# Altium PCB Capstone_Signal_Conditioning_Subsystem_Test_PCB.PcbDoc
Units mil, origin at the board's own origin, x right, y up, seen from the top; angles counter-clockwise.
Board outline 3710 x 3240 mil, 2 copper layers (Top Layer, Bottom Layer), stack 20.956 mil thick; 69 components, 68 nets, 259 pads, 87 vias.
Unrouted connection lines stored in the file: 48.
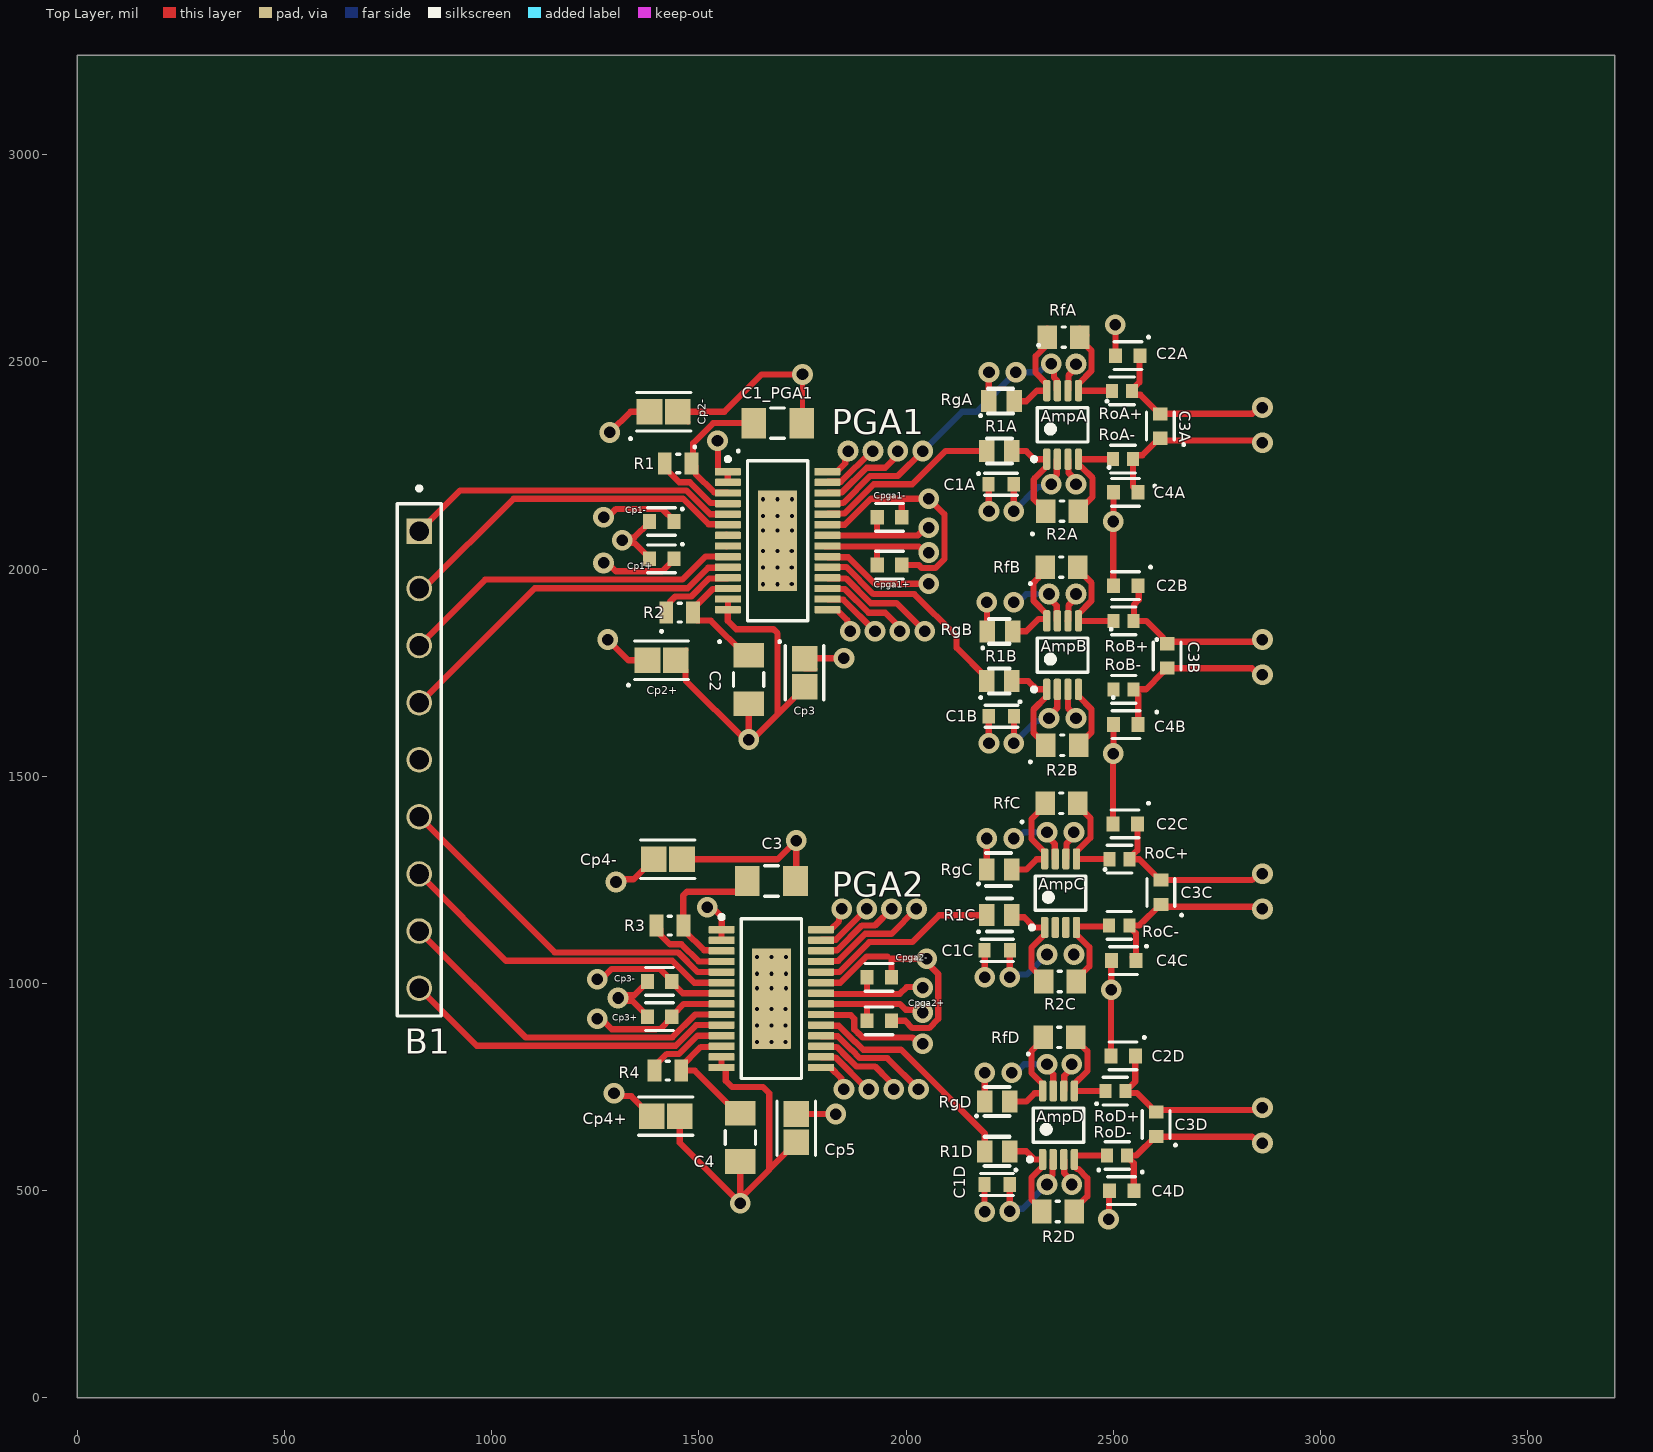
[diagram p0: Top Layer view]
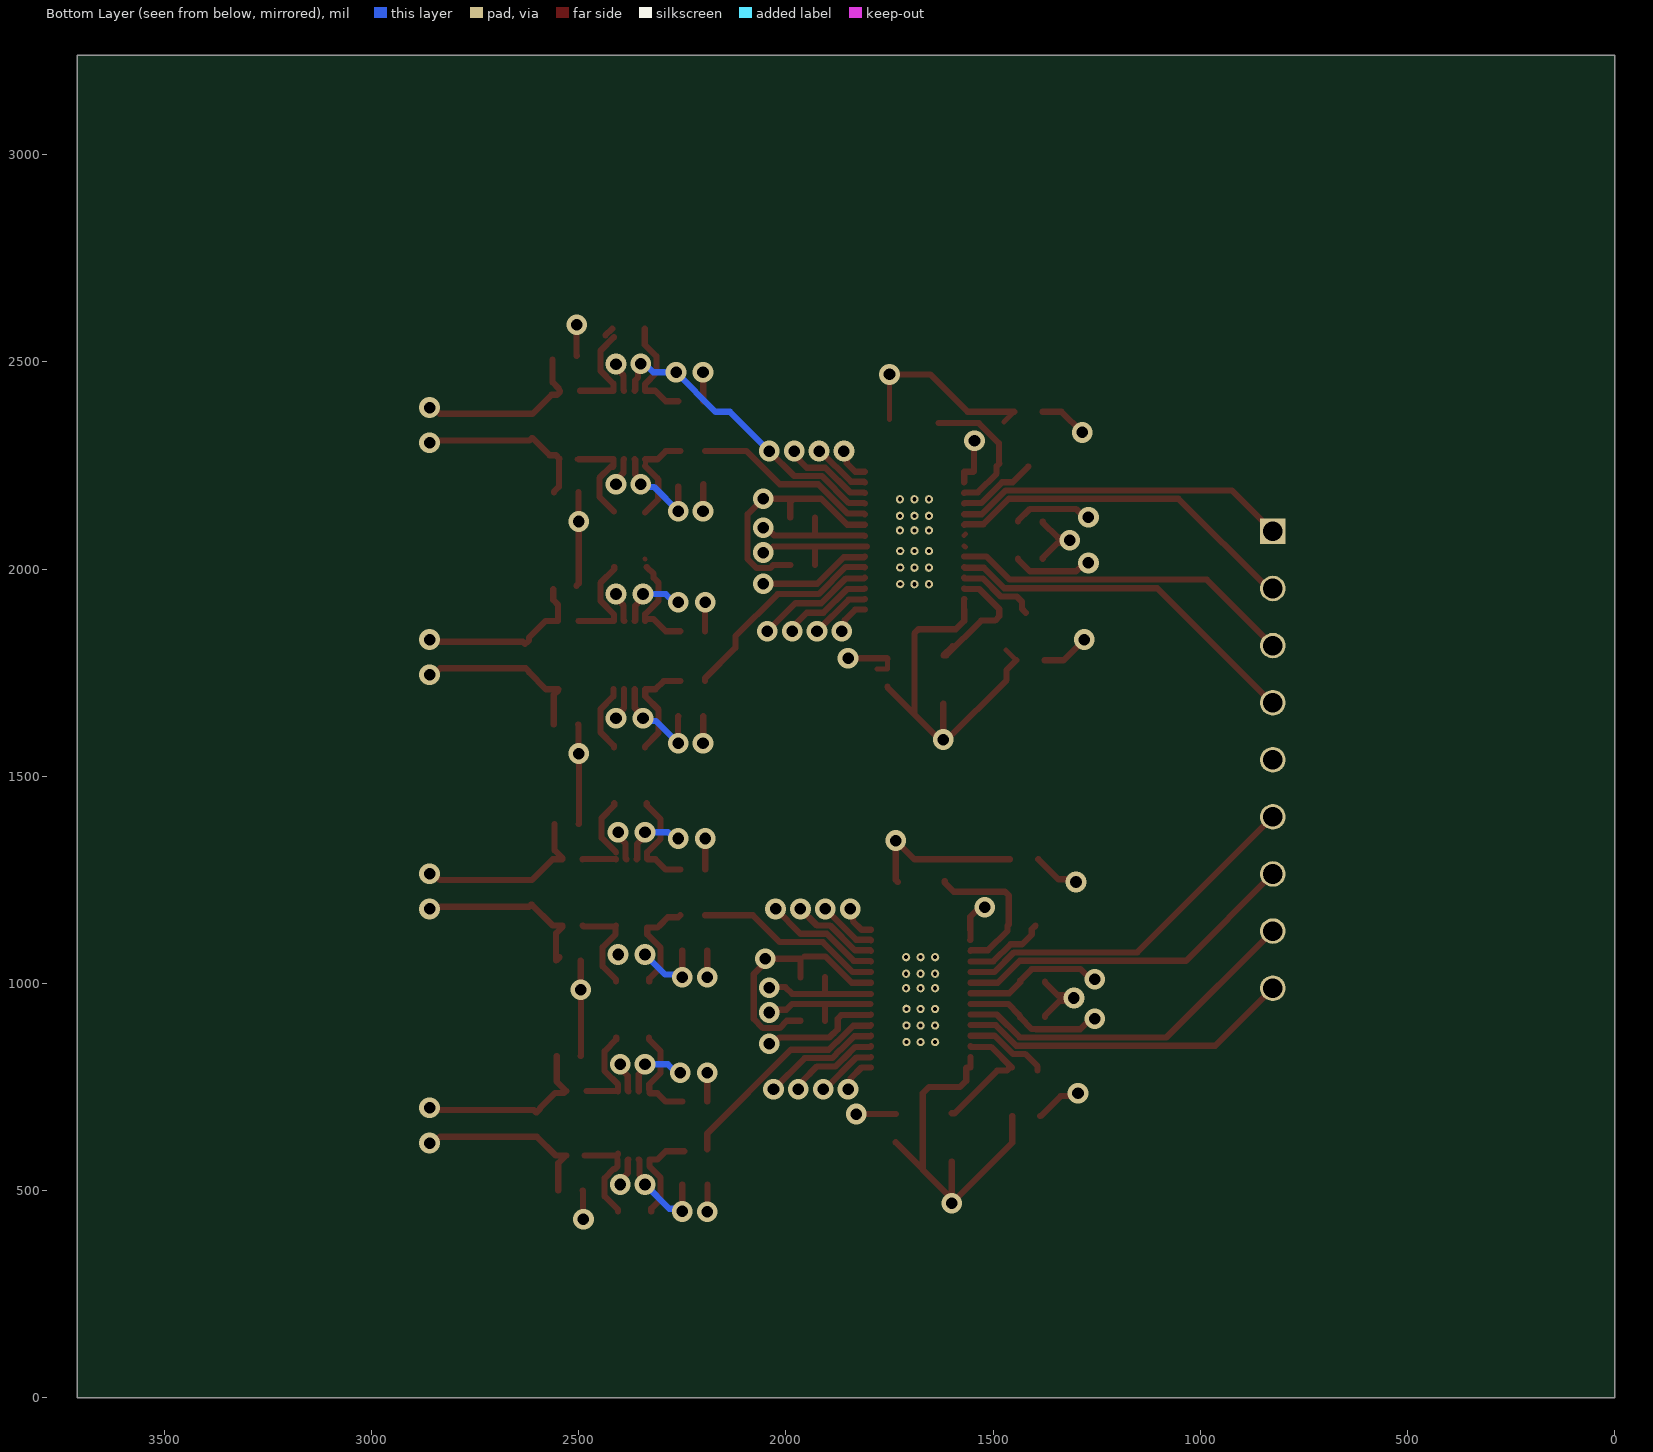
[diagram p1: Bottom Layer view, seen from below]
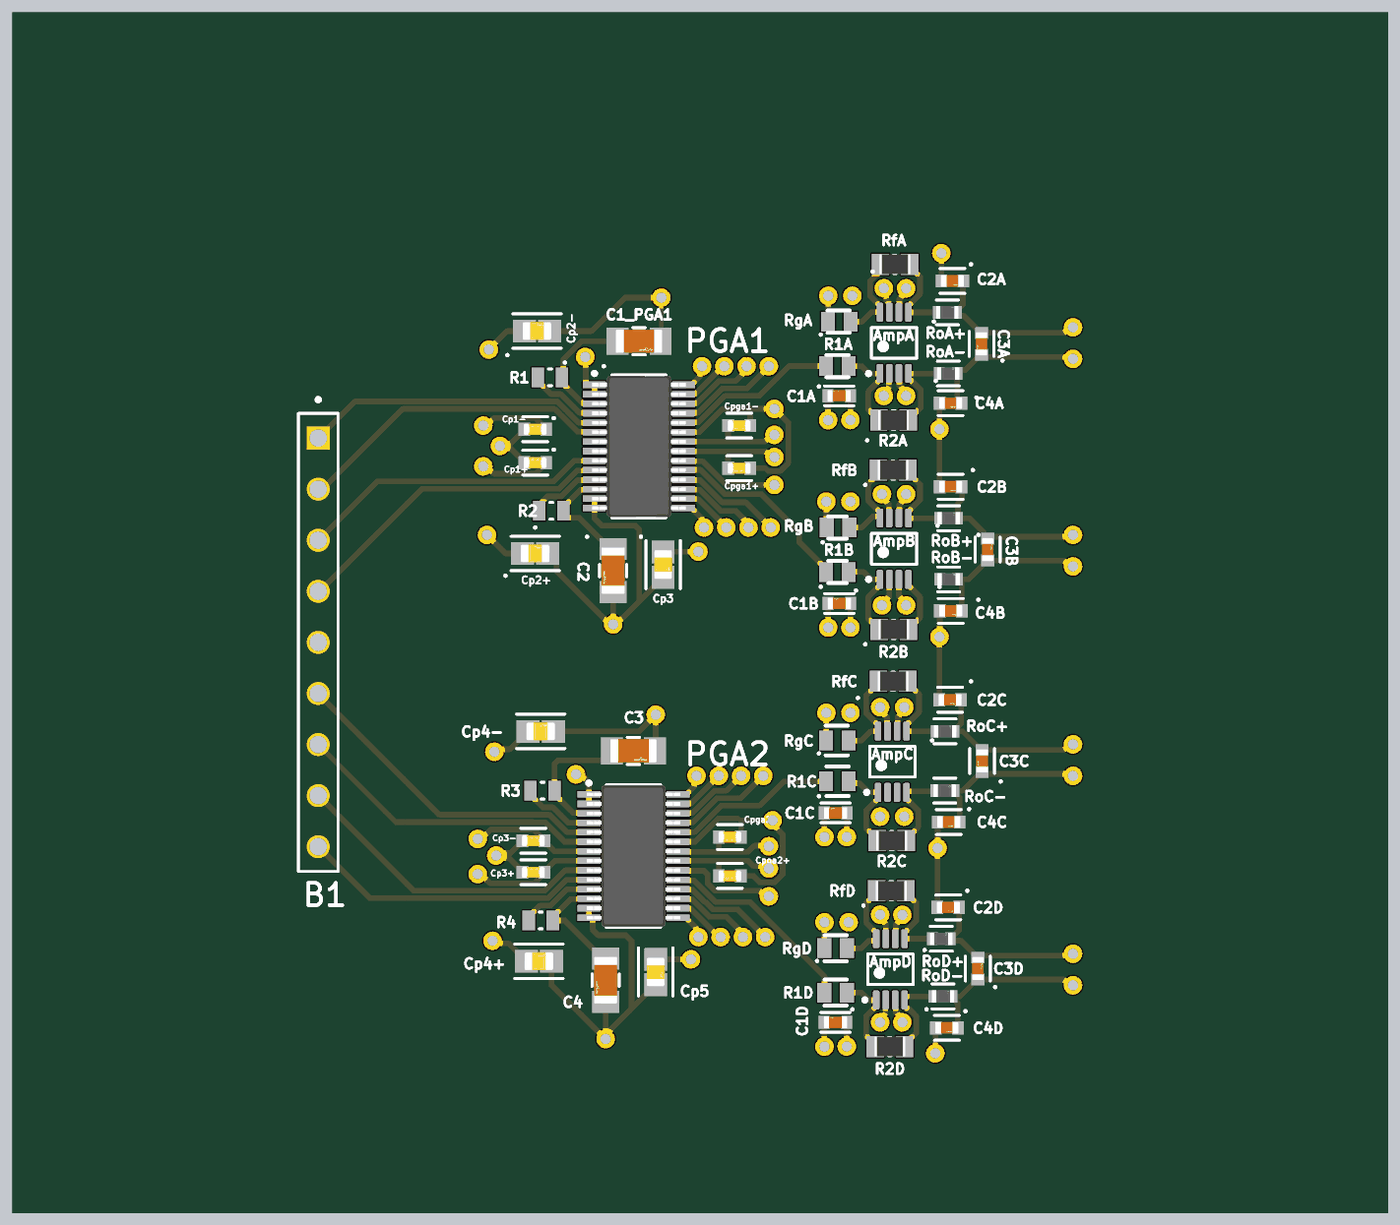
[diagram p2: 3D render of the assembled board from above, using the file's embedded part models]

## Layer stack, top to bottom
Top Solder: solder mask 0.4, Solder Resist, Dk 3.5
Top Layer: signal copper 1.378
Dielectric 2: prepreg 2.8, PP-006, Dk 4.1
Dielectric 1: dielectric 12.6, FR-4, Dk 4.8
Dielectric 3: prepreg 2.8, PP-006, Dk 4.1
Bottom Layer: signal copper 1.378
Bottom Solder: solder mask 0.4, Solder Resist, Dk 3.5

## Board outline
0,3240 0,0 3710,0 3710,3240

## Design rules (kind name [scope] priority, off if disabled: settings)
Clearance [All] p1: gap=5 ignorepadtopadclearanceinfootprint=FALSE
DiffPairsRouting [All] p1: maxlimit=10 minlimit=10 mostfreqgap=10 toplayer_minwidth=15 toplayer_maxwidth=15 toplayer_prefwidth=15 bottomlayer_minwidth=15 bottomlayer_maxwidth=15 bottomlayer_prefwidth=15 maxuncoupledlength=500
PolygonConnect [All] p1: connectstyle=Relief reliefconductorwidth=10 reliefentries=4 polygonreliefangle="90 Angle" airgapwidth=10
RoutingVias [All] p1: holewidth=28 width=50 viastyle="Through Hole" minholewidth=28 minwidth=50 maxholewidth=28 maxwidth=50
SolderMaskExpansion [All] p1: expansion=4 istentingtop=FALSE
Width [All] p1: maxlimit=250 minlimit=6 preferedwidth=15 minimp=50.000000 maximp=50.000000 favimp=50.000000
29 further rules are at their usual default settings.

## Classes and differential pairs
net class N000-1_[0..8]: Input_Channels[0..8]
component class PIC32_Subsystem: C2 C3 C4
component class "LMR51420 5V": B1
component class "LMR51420 3.3V": B2
component class PGA2: PGA2
component class Diff_Amp_2: AmpC AmpD
component class PGA1: PGA1
component class Diff_Amp_1: AmpA AmpB C1A C1B
component class Signal_Conditioning: B1
differential pair DOUT: +DOUT_P -DOUT_N
differential pair ADC_CH6_CH7: +ADC_CH6_CH7_P -ADC_CH6_CH7_N
differential pair ADC_CH4_CH5: +ADC_CH4_CH5_P -ADC_CH4_CH5_N
differential pair ADC_CH2_CH3: +ADC_CH2_CH3_P -ADC_CH2_CH3_N
differential pair ADC_CH0_CH1: +ADC_CH0_CH1_P -ADC_CH0_CH1_N

## Components (designator, comment, footprint, x,y, rotation, side; value= is the part's Value field where it differs from the comment)
AmpA "LTC6362HMS8#PBF" LT-MS8-8_L 2377.8,2348.08 r90 top
AmpB "LTC6362HMS8#PBF" LT-MS8-8_L 2377.8,1792.68 r90 top
AmpC "LTC6362HMS8#PBF" LT-MS8-8_L 2372.8,1218.08 r90 top
AmpD "LTC6362HMS8#PBF" LT-MS8-8_L 2367.8,658.08 r90 top
B1 "1945164" FP-4-644456-0-MFG 825,1540 r270 top
C1_PGA1 "GRM3195C1H163JA01D" FP-GRM319-0_15-IPC_A 1690,2352.46 r0 top
C1A "GQM1875C2ER10BB12D" FP-GQM187-0_15-MFG 2229.47,2205 r180 top
C1B "GQM1875C2ER10BB12D" FP-GQM187-0_15-MFG 2230,1645 r180 top
C1C "GQM1875C2ER10BB12D" FP-GQM187-0_15-MFG 2220,1080 r180 top
C1D "GQM1875C2ER10BB12D" FP-GQM187-0_15-MFG 2219.47,515 r180 top
C2 "GRM3195C1H163JA01D" FP-GRM319-0_15-IPC_A 1620,1733.69 r270 top
C2A "CC0603KRX7R9BB392" FP-CC0603-DA-MFG 2535,2515.22 r180 top
C2B "CC0603KRX7R9BB392" FP-CC0603-DA-MFG 2530,1960 r180 top
C2C "CC0603KRX7R9BB392" FP-CC0603-DA-MFG 2528.71,1385.22 r180 top
C2D "CC0603KRX7R9BB392" FP-CC0603-DA-MFG 2523.71,825.22 r180 top
C3 "GRM3195C1H163JA01D" FP-GRM319-0_15-IPC_A 1675,1247.46 r0 top
C3A "CC0603KRX7R9BB392" FP-CC0603-DA-MFG 2613.44,2345.4 r90 top
C3B "CC0603KRX7R9BB392" FP-CC0603-DA-MFG 2630,1790.47 r270 top
C3C "CC0603KRX7R9BB392" FP-CC0603-DA-MFG 2615,1220 r90 top
C3D "CC0603KRX7R9BB392" FP-CC0603-DA-MFG 2603.44,660 r270 top
C4 "GRM3195C1H163JA01D" FP-GRM319-0_15-IPC_A 1600,628.69 r270 top
C4A "CC0603KRX7R9BB392" FP-CC0603-DA-MFG 2530,2185.4 r180 top
C4B "CC0603KRX7R9BB392" FP-CC0603-DA-MFG 2530.53,1625 r180 top
C4C "CC0603KRX7R9BB392" FP-CC0603-DA-MFG 2525,1055.4 r180 top
C4D "CC0603KRX7R9BB392" FP-CC0603-DA-MFG 2520,500.19 r180 top
Cp1+ "CC0603KRX7R7BB104" FP-CC0603-DA-MFG 1410,2025 r180 top value="100 nF"
Cp1- "CC0603KRX7R7BB104" FP-CC0603-DA-MFG 1410,2115 r180 top value="100 nF"
Cp2+ "C2012JB1A685K060AC" FP-C2012-060-0_2-IPC_A 1410,1780 r0 top
Cp2- "C2012JB1A685K060AC" FP-C2012-060-0_2-IPC_A 1415,2380 r0 top
Cp3 "C2012JB1A685K060AC" FP-C2012-060-0_2-IPC_A 1755,1750 r270 top
Cp3+ "CC0603KRX7R7BB104" FP-CC0603-DA-MFG 1405,920 r180 top value="100 nF"
Cp3- "CC0603KRX7R7BB104" FP-CC0603-DA-MFG 1405,1005 r180 top value="100 nF"
Cp4+ "C2012JB1A685K060AC" FP-C2012-060-0_2-IPC_A 1420,680 r0 top
Cp4- "C2012JB1A685K060AC" FP-C2012-060-0_2-IPC_A 1425,1300 r0 top
Cp5 "C2012JB1A685K060AC" FP-C2012-060-0_2-IPC_A 1735,650.98 r270 top
Cpga1+ "CC0603KRX7R7BB104" FP-CC0603-DA-MFG 1960,2010 r0 top value="100 nF"
Cpga1- "CC0603KRX7R7BB104" FP-CC0603-DA-MFG 1960,2125 r0 top value="100 nF"
Cpga2+ "CC0603KRX7R7BB104" FP-CC0603-DA-MFG 1935,910 r0 top value="100 nF"
Cpga2- "CC0603KRX7R7BB104" FP-CC0603-DA-MFG 1935,1015 r0 top value="100 nF"
PGA1 "THS7002CPWP" THS7002CPWP 1689.92,2068.66 r0 top locked
PGA2 "THS7002CPWP" THS7002CPWP 1674.92,963.66 r0 top locked
R1 "CRCW08050000Z0EA" RESC2013X50X30LL20T20 1450,2255 r180 top
R1A "ERJ-6ENF1241V" RESC2013X70X40LL20T20 2225,2285.4 r0 top
R1B "ERJ-6ENF1241V" RESC2013X70X40LL20T20 2225,1730 r0 top
R1C "ERJ-6ENF1241V" RESC2013X70X40LL20T20 2225,1165 r0 top
R1D "ERJ-6ENF1241V" RESC2013X70X40LL20T20 2220,595 r0 top
R2 "CRCW08050000Z0EA" RESC2013X50X30LL20T20 1453.53,1895 r180 top
R2A "RC0805FR-071KL" RESC2013X60X35ML10T20 2376.29,2140 r0 top
R2B "RC0805FR-071KL" RESC2013X60X35ML10T20 2376.82,1575 r0 top
R2C "RC0805FR-071KL" RESC2013X60X35ML10T20 2371.29,1005 r0 top
R2D "RC0805FR-071KL" RESC2013X60X35ML10T20 2366.29,450 r0 top
R3 "CRCW08050000Z0EA" RESC2013X50X30LL20T20 1430,1140 r180 top
R4 "CRCW08050000Z0EA" RESC2013X50X30LL20T20 1425,790 r180 top
RfA "RC0805FR-071KL" RESC2013X60X35ML10T20 2380,2560 r0 top
RfB "RC0805FR-071KL" RESC2013X60X35ML10T20 2375,2005 r0 top
RfC "RC0805FR-071KL" RESC2013X60X35ML10T20 2375,1435 r0 top
RfD "RC0805FR-071KL" RESC2013X60X35ML10T20 2370,870 r0 top
RgA "ERJ-6ENF1241V" RESC2013X70X40LL20T20 2230,2405.4 r0 top
RgB "ERJ-6ENF1241V" RESC2013X70X40LL20T20 2226.57,1850 r0 top
RgC "ERJ-6ENF1241V" RESC2013X70X40LL20T20 2225,1275 r0 top
RgD "ERJ-6ENF1241V" RESC2013X70X40LL20T20 2220,715 r0 top
RoA+ "CRCW060335K7FKEA" FP-CRCW0603-e3-IPC_C 2521.3,2430.4 r0 top
RoA- "CRCW060335K7FKEA" FP-CRCW0603-e3-IPC_C 2523.7,2265.4 r0 top
RoB+ "CRCW060335K7FKEA" FP-CRCW0603-e3-IPC_C 2525,1875 r0 top
RoB- "CRCW060335K7FKEA" FP-CRCW0603-e3-IPC_C 2525,1710 r0 top
RoC+ "CRCW060335K7FKEA" FP-CRCW0603-e3-IPC_C 2515,1300 r0 top
RoC- "CRCW060335K7FKEA" FP-CRCW0603-e3-IPC_C 2514.45,1140.22 r0 top
RoD+ "CRCW060335K7FKEA" FP-CRCW0603-e3-IPC_C 2505,740.4 r0 top
RoD- "CRCW060335K7FKEA" FP-CRCW0603-e3-IPC_C 2509.45,585 r0 top

## Footprints (in the part's own frame and the unit in brackets; to place one, negate y for a bottom-side part, rotate by r counter-clockwise, add the part's x,y. Pads: shape width x height; smd on the part's side, far side on the other; paste and mask are expansions set on the pad)
FP-4-644456-0-MFG [mm] "Connector; Header; 8 Position"
  rect 1.566x1.566 hole 1.2 mask+0: 1(-14,0)
  round 1.566 hole 1.2 mask+0: 2(-10.5,0) 3(-7,0) 4(-3.5,0) 5(0,0) 6(3.5,0) 7(7,0) 8(10.5,0) 9(14,0)
  silkscreen extent -16.76,-1.35 15.7,1.35
FP-C2012-060-0_2-IPC_A [mil]
  rect 62.13x61.27 smd paste+0 mask+0: 1(-34.02,0) 2(34.02,0)
  silkscreen extent -65,-46 65,46, body extent -85,-50 85,50, height 10
FP-CC0603-DA-MFG [mm]
  rect 0.8x0.9 smd paste+0 mask+0: 1(-0.75,0) 2(0.75,0)
  silkscreen extent -0.85,-0.85 0.85,0.85, body extent -1.43,-0.82 1.43,0.82, height 0.25
FP-CRCW0603-e3-IPC_C [mil]
  rect 28.94x33.94 smd paste+0 mask+0: 1(-24.23,0) 2(24.23,0)
  silkscreen extent -30,-33 30,33, body extent -43,-23 43,23, height 10
FP-GQM187-0_15-MFG [mm]
  rect 0.75x0.9 smd paste+0 mask+0: 1(-0.775,0) 2(0.775,0)
  silkscreen extent -1,-0.67 1,0.67, body extent -1.25,-0.58 1.25,0.58, height 0.25
FP-GRM319-0_15-IPC_A [mil]
  rect 59.28x73.16 smd paste+0 mask+0: 1(-58.12,0) 2(58.12,0)
  silkscreen extent -17,-37 17,37, body extent -107,-56 107,56, height 10
LT-MS8-8_L [mm] "SOP, 8-Leads, Body 3x3mm, Pitch 0.65mm, IPC High Density"
  rrect50% 1.3x0.45 smd: 1(-2.1,0.975) 2(-2.1,0.325) 3(-2.1,-0.325) 4(-2.1,-0.975) 5(2.1,-0.975) 6(2.1,-0.325) 7(2.1,0.325) 8(2.1,0.975)
  silkscreen extent -2.22,-1.55 1.05,1.87, body extent -1.55,-1.55 1.55,1.55, height 1.1
RESC2013X50X30LL20T20 [mm] "Chip Resistor, 2-Leads, Body 2.00x1.25mm, IPC High Density"
  rect 0.85x1.35 smd: 1(-0.825,0) 2(0.825,0)
  silkscreen extent -0.1,-0.58 0.1,0.58, body extent -1.1,-0.72 1.1,0.72, height 0.5
RESC2013X60X35ML10T20 [mm] "Chip Resistor, 2-Leads, Body 2.1x1.35mm, IPC Low Density"
  rect 1.2x1.45 smd: 1(-1,0) 2(1,0)
  silkscreen extent -0.1,-0.63 0.1,0.63, body extent -1.05,-0.68 1.05,0.67, height 0.6
RESC2013X70X40LL20T20 [mm] "Chip Resistor, 2-Leads, Body 2.00x1.25mm, IPC High Density"
  rect 0.95x1.35 smd: 1(-0.775,0) 2(0.775,0)
  body extent -1.1,-0.72 1.1,0.72, height 0.7
THS7002CPWP [mm] "SOP, 28-leads, Body 4.5x9.8mm, Pitch 0.65mm, Thermal Pad 2.4x6.17mm, IPC Low Density"
  rrect22% 1.6x0.45 smd: 1(-3.05,4.225) 2(-3.05,3.575) 3(-3.05,2.925) 4(-3.05,2.275) 5(-3.05,1.625) 6(-3.05,0.975) 7(-3.05,0.325) 8(-3.05,-0.325) 9(-3.05,-0.975) 10(-3.05,-1.625) 11(-3.05,-2.275) 12(-3.05,-2.925) 13(-3.05,-3.575) 14(-3.05,-4.225) 15(3.05,-4.225) 16(3.05,-3.575) 17(3.05,-2.925) 18(3.05,-2.275) 19(3.05,-1.625) 20(3.05,-0.975) 21(3.05,-0.325) 22(3.05,0.325) 23(3.05,0.975) 24(3.05,1.625) 25(3.05,2.275) 26(3.05,2.925) 27(3.05,3.575) 28(3.05,4.225)
  round 0.508 hole 0.254: 29(-0.889,-2.667) 29(-0.889,-1.651) 29(-0.889,-0.635) 29(-0.889,0.635) 29(-0.889,1.524) 29(-0.889,2.54) 29(0,-2.667) 29(0,-1.651) 29(0,-0.635) 29(0,0.635) 29(0,1.524) 29(0,2.54) 29(0.87,-2.661) 29(0.87,-1.645) 29(0.87,-0.629) 29(0.889,0.635) 29(0.889,1.524) 29(0.889,2.54)
  rrect4% 2.4x6.17 smd: 29(0,0)
  silkscreen extent -3.17,-4.9 1.85,5.12, body extent -3.21,-4.85 3.21,4.85, height 0.98

## Part data
AmpA AmpB AmpC AmpD: library part CMP-0359-00920-2, "Single Channel, Precision, Low Power Differential Operational Amplifier / SAR ADC Driver, RRIO, 180 MHz Typical GBW, 45 V/us Typical SR, 2.8 to 5.25 V, 8-Pin SOP (MS8-8), High Temperature / Automotive, Pb-Free", Linear Technology Part Number=LTC6362, Manufacturer="Linear Technology", Channels (#)=1, ComponentLink1Description="Manufacturer URL", ComponentLink1URL=http://www.linear.com/, ComponentLink2Description=Datasheet, ComponentLink2URL=http://cds.linear.com/docs/en/datasheet/6362fa.pdf, ComponentLink3Description="Package Specification", ComponentLink3URL=http://cds.linear.com/docs/en/packaging/05081610_G_SO8.pdf, DatasheetVersion="Rev. A", GBW (MHz) Typical=180, Is (mA) Typical=0.9, Mounting Technology="Surface Mount", PackageDescription="8-Lead Plastic Small Outline, Body 3.9 x 4.9 mm, Pitch 1.27 mm", PackageReference=LT-MS8-8, PackageVersion="Rev G", PartNumber=LTC6362HMS8#PBF, RevisionNote="URLs updated", RoHS=Pb-Free, SR (V/us) Typical=45, Type=DIFF, Vos (mV) Typical=0.05, Vs Max (V)=5.25, Vs Min (V)=2.8
B1: library part CMP-03369-000038-1, "CONN HEADER VERT 9POS 3.5MM", Current Rating=5A, Manufacturer="TE Connectivity", Manufacturer Part Number=4-644456-0, Temperature="-55°C to +105°C", Temperature Range High=+105°C, Temperature Range Low=-55°C, Voltage Rating=250V, Automotive=No, Category=Conn, ComponentLink2Description=Datasheet, ComponentLink2URL=https://www.te.com/commerce/DocumentDelivery/DDEController?Action=showdoc&DocId=Data+Sheet%7F82056_MTA%7F0818%7Fpdf%7FEnglish%7FENG_DS_82056_MTA_0818.pdf%7F4-644456-0, Conn Gender=Male, Conn Orientation=Vertical, Contact Material=Tin, Device Class L1=Connectors, Device Class L2="Headers and Wire Housings", Device Class L3=unset, Digikey Description="CONN HEADER VERT 10POS 2.54MM", Footprint Url=https://www.te.com/commerce/DocumentDelivery/DDEController?Action=showdoc&DocId=Customer+Drawing%7F644456%7FD2%7Fpdf%7FEnglish%7FENG_CD_644456_D2.pdf%7F4-644456-0, Height=0.408inch, Lead Free=Yes, Mouser Description="Headers & Wire Housings NARROW FLT HDR 10P Straight Post", Number Of Contacts=10, Number of Rows=1, Octopart=https://octopart.com/4-644456-0-te+connectivity-39514173, Package=4-644456-0, Pitch=2.54mm, RoHS=TRUE
C1_PGA1: library part CMP-06035-007665-1, "Chip Multilayer Ceramic Capacitors for General Purpose, 1206, 16000pF, C0G, 30ppm/°C, 5%, 50V", Capacitance=16nF, Case Code (Imperial)=1206, Case Code (Metric)=3216, Dielectric=C0G, Max Operating Temperature=125°C, Min Operating Temperature=-55°C, Package Quantity=4000, Tolerance=5%, Voltage Rating=50V, Case/Package=1206, Depth=1.6mm, Height=0.85mm, Length=3.2mm, Mount="Surface Mount", Packaging="Tape and Reel", Radiation Hardening=No, Termination=SMD/SMT, Thickness=0.037inch, Voltage Rating (DC)=50V, Width=0.063inch
C1A C1B C1C C1D: library part CMP-06035-052255-1, "Ceramic Capacitor 0.1pF ±0.1pF 250VDC C0G 0603 Paper T/R", Capacitance=0.1pF, Case Code (Imperial)=0603, Case Code (Metric)=1608, Dielectric=C0G, Max Operating Temperature=125°C, Min Operating Temperature=-55°C, Package Quantity=4000, Voltage Rating=250V, Case/Package=0603, Depth=0.8mm, Height=0.7mm, Length=1.6mm, Mount="Surface Mount", Packaging="Tape and Reel", Radiation Hardening=No, Termination=SMD/SMT, Thickness=0.031inch, Voltage Rating (DC)=250V, Width=0.031inch
C2 C3 C4: library part CMP-2000-05439-1, "Chip Capacitor, 100 nF, +/- 10%, 16 V, -55 to 125 degC, 0402 (1005 Metric), RoHS, Tape and Reel / CL05B104KO5NNNC", Capacitance=100000pF, Case Size/Dimension=0402, Dielectric=X7R, Manufacturer="Samsung Electro-Mechanics", Rated Voltage=16V, Tolerance (%)=±10%, Datasheet URL=https://datasheet.ciiva.com/29198/458718-da-01-en-vs-kondensator-0402-29198423.pdf, Datasheet Version=Nov-10, Manufacturer URL=http://www.samsungsem.com/global/index.jsp
C2A C2B C2C C2D C3A C3B C3C C3D C4A C4B C4C C4D: library part CMP-03422-000635-2, "CAP CER 3900PF 50V X7R 0603", Capacitance=3.9nF, Case Code (Imperial)=0603, Case Code (Metric)=1608, Dielectric=X7R, Dielectric Material=Ceramic, Insulation Resistance=100GR, Max Operating Temperature=125°C, Min Operating Temperature=-55°C, Package Quantity=4000, Tolerance=10%, Voltage=50V, Case/Package=0603, Construction=Flat, Depth=0.8mm, Halogen Free="Halogen Free", Height=0.8mm, Lead Free="Lead Free", Length=1.6mm, Mount="Surface Mount", Number of Pins=2, Packaging="Tape and Reel", Radiation Hardening=No, REACH SVHC="No SVHC", Resistor Type=Ceramic, RoHS Compliant=Yes, Series=CC, Termination=SMD/SMT, Thickness=0.035inch, Voltage Rating=50V, Voltage Rating (DC)=50V, Width=0.8mm
Cp1+ Cp1- Cp3+ Cp3- Cpga1+ Cpga1- Cpga2+ Cpga2-: library part CMP-2000-05002-2, "CAP CER 0.1UF 16V X7R 0603", Capacitance="100 nF", Manufacturer=YAGEO, Package=CC0603-DA, Temperature="-55°C to +125°C", Temperature Characteristic=X7R, Temperature Coefficient=15%, Temperature Range High=+125°C, Temperature Range Low=-55°C, Tolerance=0.1, Voltage="16 V", Automotive=No, Category=Cap, ComponentLink2Description=Datasheet, ComponentLink2URL=http://www.yageo.com/documents/recent/UPY-GPHC_X7R_6.3V-to-50V_18.pdf, Device Class L1="Passive Components", Device Class L2=Capacitors, Device Class L3="Ceramic Capacitors", Digikey Description="CAP CER 0.1UF 16V X7R 0603", Footprint Url=http://www.yageo.com/exep/pages/download/literatures/UPY-C_GEN_24.pdf, Height=0.9mm, Lead Free=Yes, Manufacturer Part Number=CC0603KRX7R7BB104, Material=Ceramic, Mouser Description="Multilayer Ceramic Capacitor, CC Series, 0.1 - F, - 10%, X7R, 16 V, 0603 [1608 Metric]", Octopart=https://octopart.com/cc0603krx7r7bb104-yageo-192941, RoHS=TRUE, Voltage Rating="16 V"
Cp2+ Cp2- Cp3 Cp4+ Cp4- Cp5: library part CMP-08246-004641-1, "Multilayer Ceramic Capacitors 6.8μF ±10% 10V JB SMD 0805", Capacitance=6.8uF, Case Code (Imperial)=2012, Case Code (Metric)=5032, Case/Package=0805, Dielectric Material=Ceramic, Max Operating Temperature=85°C, Min Operating Temperature=-25°C, Package Quantity=4000, Tolerance=10%, Voltage Rating=10V, Lead Free="Lead Free", Length=0.079inch, Mount="Surface Mount", Packaging="Tape and Reel", RoHS Compliant=Yes, Series=C, Thickness=0.028inch, Voltage Rating (DC)=10V, Width=0.049inch
PGA1 PGA2: library part CMP-0988-00132-2, "70-MHz High-Speed Programmable-Gain Amplifier, Dual, 0 to 70 degC, 28-pin SOP (PWP28), Green (RoHS & no Sb/Br)", Manufacturer="Texas Instruments", BW @ Acl(MHz)=100, Code_JEDEC=MO-153, ComponentLink1Description="Manufacturer URL", ComponentLink1URL=http://www.ti.com/, ComponentLink2Description=Datasheet, ComponentLink2URL=http://www.ti.com/general/docs/lit/getliterature.tsp?genericPartNumber=THS7002&fileType=pdf, ComponentLink3Description="Package Specification", ComponentLink3URL=http://www.ti.com/litv/pdf/mpds373, DatasheetVersion=SLOS214C, Disable=TRUE, Eco-Plan="Green (RoHS & no Sb/Br)", Iib(Max)(nA)=6000, Mounting Technology="Surface Mount", Number of Channels=2, PackageDescription="28-Pin Plastic Small Outline, Body 4.4 x 9.7 mm, Pitch 0.65 mm", PackageReference=PWP0028E, PackageVersion="4073225-6/I, 05/2011", PartNumber=THS7002CPWP, Slew Rate(Typ)(V/us)=85, SubFamily="Variable Gain Amplifier", Vio(Max)(mV)=7, Vn at Flatband(Typ)(nV/rtHz)=1.7, Vs(Max)(V)=32, Vs(Min)(V)=9
R1: library part CMP-1011-00001-2, "RC0402JR-070RL", Manufacturer="Yageo / Phycomp", Part Number=RC0402JR-070RL
R1A R1B R1C R1D RgA RgB RgC RgD: library part CMP-2001-04406-1, Manufacturer=Panasonic, Part Number=ERJ-6ENF1241V
R2: library part CMP-2002-00609-3, "Chip Resistor, 1 MOhm, +/- 1%, 100 mW, -55 to 155 degC, 0402 (1005 Metric), RoHS, Tape and Reel / ERJ-2RKF1004X", Case Code (Imperial)=0402, Case Code (Metric)=1005, Manufacturer="Basic Passives", Max Operating Temperature="155 degC", Min Operating Temperature="-55 degC", Package Quantity=10000, PartNumber=ERJ-2RKF1004X, Power Rating="100 mW", Resistance="1 MOhm", Tolerance=1%, Voltage Rating="50 V", Case\/Package=0402, ComponentLink1Description="Manufacturer URL", ComponentLink1URL=http://www.panasonic.com/, ComponentLink2Description=Datasheet, ComponentLink2URL=http://industrial.panasonic.com/cdbs/www-data/pdf/RDA0000/AOA0000C86.pdf, DatasheetVersion=04/2015, Height="0.35 mm", Length="1 mm", Mount="Surface Mount", Mounting Technology="Surface Mount", PackageDescription="2-Pin Surface Mount Device, Body 1 x 0.5 mm", PackageReference=0402, Packaging="Tape and Reel", Pins=2, Radiation Hardening=No, REACH SVHC=Yes, RoHSCompliant=true, Weight=2.8E-05oz, Width="0.5 mm"
R2A R2B R2C R2D RfA RfB RfC RfD: library part CMP-2100-03671-1, "Chip Resistor, 1 KOhm, +/- 1%, 125 mW, -55 to 155 degC, 0805 (2012 Metric), RoHS, Tape and Reel", Case Code (Imperial)=0805, Case Code (Metric)=2012, Manufacturer=Yageo, Max Operating Temperature=155degC, Max Power Dissipation=125mW, Min Operating Temperature=-55degC, Package Description="2-Pin Surface Mounted Device, Body 2 x 1.25 mm", Package Quantity=1, Resistance=1KOhm, Temperature Coefficient=100ppm/degreesC, Tolerance=1%, Voltage Rating=150V, Case/Package=0805, Composition=ThickFilm, Datasheet URL=http://www.yageo.com/NewPortal/yageodocoutput?fileName=/pdf/R-Chip/PYu-RC_Group_51_RoHS_L_5.pdf, Datasheet Version="Rev. 5, 10/2016", Depth=1.25mm, Height=0.024inch, Lead Free=LeadFree, Length=0.079inch, Manufacturer URL=http://www.yageo.com/, Military Standard=Not, Number of Pins=2, Number of Terminations=2, Package Reference=0805, Packaging=TapeandReel, Power Rating=125mW, REACH SVHC=Unknown, RoHSCompliant=true, Termination=SMD/SMT, Voltage Rating (DC)=150V, Width=0.049inch
R3: library part CMP-2000-07588-1, "Chip Resistor, 10 KOhm, +/- 1%, 0.1 W, -55 to 155 degC, 0402 (1005 Metric), RoHS, Tape and Reel / ERJ2RKF1002X", Case Code (Imperial)=0402, Case Code (Metric)=1005, Manufacturer=Panasonic, Max Operating Temperature=155degC, Max Power Dissipation=100mW, Min Operating Temperature=-55degC, Package Description="2-Pin Surface Mount Device, Body 1 x 0.5 mm", Package Quantity=1, Package Reference=402, Resistance=10KOhm, Temperature Coefficient=100ppm\/degreesC, Tolerance=1%, Voltage Rating=50V, Case\/Package=0402, Composition=ThickFilm, Contact Plating=Tin, Datasheet URL=https://industrial.panasonic.com/cdbs/www-data/pdf/RDA0000/AOA0000C304.pdf, Datasheet Version=02/2017, Depth=0.5mm, Height=0.35mm, Lead Free=LeadFree, Length=1mm, Manufacturer URL=http://www.panasonic.com/, Military Standard=Not, Mount=SurfaceMount, Mounting Technology=SurfaceMount, Number of Pins=2, Number of Terminations=2, Packaging=TapeandReel, Power Rating=100mW, Radiation Hardening=No, REACH SVHC=NoSVHC, RoHSCompliant=True, Termination=SMD/SMT, Voltage Rating (DC)=50V, Width=0.02inch
R4: library part CMP-2001-04406-1, Manufacturer=Panasonic, Part Number=ERJ-6ENF1241V
RoA+ RoA- RoB+ RoB- RoC+ RoC- RoD+ RoD-: library part CMP-2000-03264-2, "RES Thick Film, 35.7kΩ, 1%, 0.1W, 100ppm/°C, 0603", Case Code (Imperial)=0603, Case Code (Metric)=1608, Max Operating Temperature=155°C, Max Power Dissipation=100mW, Min Operating Temperature=-55°C, Package Quantity=10, Resistance=35.7kR, Temperature Coefficient=100ppm/°C, Tolerance=1%, Voltage Rating=75V, Case/Package=0603, Composition="Thick Film", Contact Plating=Tin, Depth=0.85mm, Features="Automotive AEC-Q200", Height=0.45mm, Length=1.55mm, Military Standard=Not, Number of Pins=2, Number of Terminations=2, Packaging="Tape and Reel", Power Rating=100mW, Radiation Hardening=No, Termination=Solder, Weight=7.1E-05oz, Width=0.033inch

## Via types
v1: diameter 50, hole 28, Top Layer to Bottom Layer, 87 vias

## Nets (pads, with @x,y where several pads share a name; then routed paths per layer and width w, separated by ;. In a path a pad name is that pad's centre, name@x,y a point inside that pad or via, vN(x,y) a via of type N, cw(c..) or ccw(c..) an arc to the next point about the centre after c; other vN are vias at no path point)
+5V: AmpA.3 AmpB.3 AmpC.3 AmpD.3 Cp3.1 Cp5.1 PGA1.20 PGA2.20 | length 1016.3
  Top Layer w12: Cp3.1 1755,1758.95 Cp3.1@1779.63,1758.95
  Top Layer w15: Cp5.1 v1(1830,685) ; Cp3.1 1755.98,1785 v1(1850,1785) ; PGA2.20 1796.36,923.92 1866.21,923.92 1875,915.13 1875,889.33 1884.67,879.66 1885.19,879.66 1894.85,870 2015.53,870 2030.53,855 v1(2040,855) ; PGA1.20 1811.36,2028.92 1860.41,2028.92 1924.33,1965 v1(2055,1965) ; AmpD.3 2381.95,574.05 2381.95,542.52 2400,524.47 v1(2400,515) ; AmpB.3 2390.59,1664.95 2410,1645.55 v1(2410,1640) ; AmpA.3 2391.95,2264.05 2391.95,2232.52 2410,2214.47 v1(2410,2205)
  other v1: 2405,1070
"A GP0": PGA1.28 | length 84
  Top Layer w15: PGA1.28 1832.64,2235 1853.3,2255.67 1853.3,2278.3 v1(1860,2285)
"A GP1": PGA1.27 | length 141.3
  Top Layer w15: PGA1.27 1811.36,2210.77 1842.66,2210.77 1916.89,2285 v1(1920,2285)
"A GP2": PGA1.26 | length 217.5
  Top Layer w15: PGA1.26 1811.36,2185.18 1845.35,2185.18 1905.17,2245 1949.47,2245 1980,2275.53 v1(1980,2285)
ADC_CH_A+: C2A.1 C3A.2 RoA+.2 | length 416.8
  Top Layer w15: RoA+.2@2545,2430 2545,2428.43 2552.5,2420.93 2565.47,2420.93 2611.47,2374.93 C3A.2 2835.46,2374.93 2850.53,2390 v1@2855,2390 ; RoA+.2@2547.62,2435 2563.24,2450.62 C2A.1@2563.24,2505.4
  other v1: 2860,2390
ADC_CH_A-: C3A.1 C4A.1 RoA-.2 | length 423.6
  Top Layer w15: RoA-.2@2546.67,2266.67 2554.87,2274.87 2570.47,2274.87 2611.47,2315.88 C3A.1 2618.87,2310.44 2854.56,2310.44 v1(2860,2305) ; RoA-.2 2547.93,2198.97 2560,2186.9 C4A.1@2560,2185
ADC_CH_B+: C2B.1 C3B.1 RoB+.2 | length 413.4
  Top Layer w15: C2B.1@2561.28,1951.75 2561.28,1925.75 2550,1914.47 2550,1875 2580,1875 2619.78,1835.22 2619.78,1828.25 C3B.1@2623.03,1825 ; C3B.1 2635,1825 2855,1825 v1(2860,1830)
ADC_CH_B-: C3B.2 C4B.1 RoB-.2 | length 425.5
  Top Layer w15: RoB-.2 2579.06,1710 2619.78,1750.73 2619.78,1752.7 2628.03,1760.94 C3B.2 2834.58,1760.94 2850.53,1745 v1(2860,1745) ; RoB-.2@2550,1706.73 2560.06,1696.67 C4B.1
ADC_CH_C+: C2C.1 C3C.2 RoC+.2 | length 440.1
  Top Layer w15: C2C.1 2558.24,1321.51 2540,1303.27 2540,1300 2562.56,1300 2613.03,1249.53 C3C.2 2835.06,1249.53 2850.53,1265 v1(2860,1265)
ADC_CH_C-: C3C.1 C4C.1 RoC-.2 | length 447.5
  Top Layer w15: C4C.1@2546.28,1063.65 C4C.1 2554.53,1121.87 2540,1136.4 2540,1140 2562.56,1140 2613.03,1190.47 C3C.1 2620.24,1185.24 2854.76,1185.24 v1(2860,1180)
ADC_CH_D+: C2D.1 C3D.1 RoD+.2 | length 451.6
  Top Layer w15: RoD+.2 RoD+.2@2530.4,740.4 ; C2D.1 2553.24,763.24 RoD+.2@2530.4,740.4 ; v1(2860,700) 2854.76,694.76 2608.67,694.76 C3D.1 2601.47,689.53 2593.22,697.78 2593.22,699.74 2557.41,735.55 2536.2,735.55 2531.35,740.4 RoD+.2@2530.4,740.4
ADC_CH_D-: C3D.2 C4D.1 RoD-.2 | length 442.5
  Top Layer w15: RoD-.2@2530,585 2531.18,585 2549.53,566.65 C4D.1 ; RoD-.2 2555.99,585 C3D.2@2600.99,630 ; C3D.2 2835.06,630.47 2850.53,615 v1(2860,615)
"B GP0": PGA1.15 | length 88.4
  Top Layer w15: PGA1.15 1832.64,1902.32 1858.3,1876.66 1858.3,1856.7 v1(1865,1850)
"B GP1": PGA1.16 | length 148
  Top Layer w10: PGA1.16@1808.03,1929.25 PGA1.16@1808.53,1928.76
  Top Layer w15: PGA1.16 1811.36,1926.56 1848.44,1926.56 v1(1925,1850)
"B GP2": PGA1.17 | length 223.4
  Top Layer w15: PGA1.17 1811.36,1952.15 1852.33,1952.15 1909.48,1895 1949.47,1895 1985,1859.47 v1(1985,1850)
C_GP0: PGA2.28 | length 79
  Top Layer w15: PGA2.28 1817.64,1130 1838.3,1150.67 1838.3,1168.3 v1@1845,1175
  other v1: 1845,1180
C_GP1: PGA2.27 | length 144.4
  Top Layer w15: PGA2.27 1796.36,1105.77 1830.77,1105.77 v1(1905,1180) v1@1901.89,1180
C_GP2: PGA2.26 | length 211.9
  Top Layer w15: PGA2.26 1796.36,1080.18 1833.46,1080.18 1893.28,1140 1925,1140 v1(1965,1180)
D_GP0: PGA2.15 | length 88.4
  Top Layer w15: PGA2.15 1817.64,797.32 1843.3,771.66 1843.3,751.7 v1(1850,745)
D_GP1: PGA2.16 | length 147.3
  Top Layer w15: PGA2.16 1796.36,821.56 1829.64,821.56 1906.19,745 v1(1910,745)
D_GP2: PGA2.17 | length 223.7
  Top Layer w15: PGA2.17 1796.36,847.15 1832.33,847.15 1859.81,819.66 1860.34,819.66 1880,800 1925,800 1942.09,782.91 1942.09,782.38 1970,754.47 v1(1970,745)
GND: AmpA.6 AmpB.6 AmpC.6 AmpD.6 C1_PGA1.2 C1A.2 C1B.2 C1C.2 C1D.2 C2.2 C2A.2 C2B.2 C2C.2 C2D.2 C3.2 C4.2 C4A.2 C4B.2 C4C.2 C4D.2 Cp1+.2 Cp1-.2 Cp2+.2 Cp2-.2 Cp3+.2 Cp3-.2 Cp3.2 Cp4+.2 Cp4-.2 Cp5.2 Cpga1+.2 Cpga1-.2 Cpga2+.2 Cpga2-.2 PGA1.1 PGA1.2 PGA1.13 PGA1.14 PGA1.23 PGA2.1 PGA2.2 PGA2.13 PGA2.14 PGA2.23 RgA.1 RgB.1 RgC.1 RgD.1 | length 6219.3
  Top Layer w12: Cp2+.2 Cp2+.2@1468.65,1804.63 ; Cp2-.2 Cp2-.2@1473.65,2355.37 ; C1_PGA1.2@1750,2360.58 v1(1750,2470)
  Top Layer w15: Cp3+.2@1375,920 1375,922.44 1339.14,958.3 1311.7,958.3 v1(1305,965) 1311.7,971.7 1344.14,971.7 1375,1002.56 Cp3-.2@1375,1005 ; Cp1+.2@1380,2025 1380,2027.44 1344.14,2063.3 1321.7,2063.3 v1(1315,2070) 1321.7,2076.7 1344.14,2076.7 1380,2112.56 Cp1-.2@1380,2115 ; Cp2+.2 1444.45,1780 1467.58,1756.87 1467.58,1732.42 1611.31,1588.69 v1(1620.13,1588.69) ; Cp2-.2 1561.56,2380 1651.56,2470 v1(1750,2470) ; Cp4+.2@1454.45,680 Cp4+.2 1454.02,615.98 v1(1600,470) ; Cp4-.2 1690,1300 v1(1735,1345) 1735,1250 C3.2@1730,1245 ; v1(1520,1184.05) 1526.7,1177.35 1539.01,1177.35 1555,1161.36 PGA2.1@1555,1130 ; v1(1545,2310) 1546.4,2308.6 1546.4,2236.36 1547.76,2235 PGA1.1 1569.84,2210.16 PGA1.2@1570,2210 ; PGA2.14 1563.64,797.32 1565,795.96 1565,765 1580,750 1655,750 1670,735 1670,555 ; PGA2.14@1554.84,800.16 PGA2.13 ; PGA2.1 1554.84,1105.16 PGA2.2@1555,1105 ; PGA1.14 1569.84,1875.16 1590,1855 1680,1855 1690,1845 1690,1655 ; PGA1.13 1570,1927.76 PGA1.14@1570,1905 ; C4.2 v1(1600,470) ; v1@1618.82,1590 1629.45,1590 1755,1715.55 Cp3.2 ; C2.2 1620.13,1675.43 v1@1620.13,1595.38 ; Cp5.2 1735,616.53 1606.7,488.23 1606.7,476.7 v1(1600,470) ; PGA2.23 1841.38,1002.05 1904.33,1065 1955,1065 ; PGA1.23 1852.07,2107.05 1915.03,2170 1980.74,2170 ; Cpga2+.2 1997.9,910 2015.4,892.5 2055.53,892.5 2077.5,914.47 2077.5,1023.03 2045,1055.53 v1@2045,1060 ; Cpga2-.2@1965,1015 1965,1060 v1(2050,1060) ; Cpga1+.2 2030.4,2010 2037.9,2002.5 2070.53,2002.5 2092.5,2024.47 2092.5,2132.5 v1(2055,2170) 1980.74,2170 ; Cpga1-.2 1989.53,2161.21 1980.74,2170 ; C1D.2 2189.48,514.48 2189.48,450.52 v1@2190,450 ; RgD.1 2189.74,715.26 2189.74,784.74 v1(2190,785) ; C1C.2 2189.74,1079.74 2189.74,1015.26 v1(2190,1015) ; RgC.1@2195,1275 2194.74,1275.26 2194.74,1349.74 v1(2195,1350) ; RgB.1@2195,1850 2195.53,1850.53 2195.53,1919.47 v1(2195,1920) ; C1A.2 2199.48,2204.48 2199.48,2140.09 v1(2200,2139.57) ; C1B.2 2199.74,1644.74 2199.74,1580.26 v1(2200,1580) ; RgA.1 2199.74,2405.66 2199.74,2474.74 v1(2200,2475) ; AmpD.6@2380,740 2381.95,741.95 2381.95,777.48 2400,795.53 v1(2400,805) ; AmpC.6@2385,1300 2386.95,1301.95 2386.95,1337.48 2405,1355.53 v1(2405,1365) ; AmpB.6@2390,1875 2391.95,1876.95 2391.95,1912.48 2410,1930.53 v1(2410,1940) ; AmpA.6 2391.95,2432.12 2391.95,2467.48 2410,2485.53 v1(2410,2495) ; v1@2490,430 2489.6,430.4 2489.6,499.31 C4D.2 ; C2D.2@2495,825 2494.59,825.41 2494.59,984.59 v1(2495,985) 2495.24,985.24 2495.24,1055.17 C4C.2 ; C2C.2@2500,1385 2499.59,1385.41 2499.59,1554.59 v1(2500,1555) 2500.5,1555.5 2500.5,1624.5 C4B.2 ; C4A.2 2500.24,2185.17 2500.24,2115.24 v1(2500,2115) 2500,1965.47 C2B.2@2505.47,1960 ; C2A.2@2505,2515 2505.24,2515.24 2505.24,2589.76 v1(2505,2590)
  other v1: 2488.72,431.47 2190,449.57
NetAmpA_1: AmpA.1 R1A.2 R2A.1 | length 247.3
  Top Layer w12: AmpA.1@2339.41,2248.67 AmpA.1
  Top Layer w15: R1A.2@2255,2285 2290,2285 2309.6,2265.4 AmpA.1 ; AmpA.1@2339.41,2248.67 2310,2219.26 2310,2217.92 2308.01,2215.94 2308.01,2168.83 R2A.1@2340,2136.84
NetAmpA_2: AmpA.2 C1A.1 | length 244.4
  Top Layer w12: AmpA.2 AmpA.2@2365.91,2264.49
  Top Layer w15: v1(2260,2140) C1A.1@2259.99,2199.58 ; v1(2350,2205) 2350,2214.47 2363.64,2228.11 2363.64,2264.05 AmpA.2
  Bottom Layer w15: v1(2260,2140) 2318.3,2198.3 2343.3,2198.3 v1(2350,2205)
NetAmpA_4: AmpA.4 R2A.2 RoA-.1 | length 246.6
  Top Layer w10: RoA-.1@2500,2265.4 RoA-.1@2505,2265.4
  Top Layer w15: R2A.2@2415,2139.26 2450,2174.26 2450,2220 2422.69,2247.31 2417.54,2247.31 2416.18,2248.67 AmpA.4 RoA-.1 2499.6,2265.4 RoA-.1@2500,2265
NetAmpA_5: AmpA.5 RfA.2 RoA+.1 | length 258
  Top Layer w15: RfA.2@2415,2560 2415,2559.45 2447.5,2526.95 2447.5,2478.81 2416.18,2447.49 AmpA.5 ; AmpA.5@2417.54,2430.4 RoA+.1 ; RfA.2@2419.37,2580.4 RfA.2@2435.49,2564.28
NetAmpA_8: AmpA.8 RfA.1 RgA.2 | length 262.8
  Top Layer w15: RgA.2@2260,2405 2290,2405 2315.76,2430.76 AmpA.8 ; AmpA.8@2340,2430.76 2340,2446.9 2312.5,2474.4 2312.5,2513.61 2340.63,2541.74 RfA.1@2340.63,2580.4
NetAmpB_1: AmpB.1 R1B.2 R2B.1 | length 259.4
  Top Layer w15: R1B.2@2255,1730 R1B.2 2295,1730 2315,1710 AmpB.1 2339.41,1693.27 2307.5,1661.36 2307.5,1604.87 2340,1572.37 R2B.1@2340,1570
NetAmpB_2: AmpB.2 C1B.1 | length 253.3
  Top Layer w15: v1(2260,1580) 2260.26,1580.26 2260.26,1644.74 C1B.1@2260,1645 ; v1(2345,1640) 2345,1644.95 2365,1664.95 AmpB.2
  Bottom Layer w15: v1(2260,1580) 2313.3,1633.3 2338.3,1633.3 v1(2345,1640)
NetAmpB_4: AmpB.4 R2B.2 RoB-.1 | length 166.4
  Top Layer w15: R2B.2@2415,1570 2415,1573.73 2447.5,1606.23 2447.5,1661.95 2416.18,1693.27 AmpB.4
NetAmpB_5: AmpB.5 RfB.2 RoB+.1 | length 242.7
  Top Layer w15: RfB.2 2414.37,2000.08 2447.5,1966.95 2447.5,1923.41 2415,1890.91 AmpB.5@2415,1875.35 ; AmpB.5@2415,1875 2415.18,1875.18 2500.59,1875.18 RoB+.1
NetAmpB_8: AmpB.8 RfB.1 RgB.2 | length 257.2
  Top Layer w10: RfB.1@2339.41,2023.78 RfB.1@2340.63,2025
  Top Layer w15: RgB.2@2255,1850 RgB.2 2290,1850 2320,1880 2338.05,1880 2339.41,1878.64 AmpB.8 ; RfB.1 2319.51,1988.88 2319.51,1979.51 2307.5,1967.5 2307.5,1924 2340,1891.5 AmpB.8@2340,1875.35
NetAmpC_1: AmpC.1 R1C.2 R2C.1 | length 246.7
  Top Layer w15: R1C.2@2255,1165 2260,1160 2285,1160 2305,1140 2309.6,1135.4 AmpC.1 2334.41,1118.67 2302.5,1086.76 2302.5,1039.34 2330,1011.84 R2C.1@2330,1005
NetAmpC_2: AmpC.2 C1C.1 | length 178
  Top Layer w15: v1(2250,1015) 2250.26,1015.26 2250.26,1079.74 C1C.1
  Bottom Layer w15: v1(2250,1015) 2256.7,1021.7 2291.7,1021.7 v1(2340,1070)
NetAmpC_4: AmpC.4 R2C.2 RoC-.1 | length 239
  Top Layer w15: R2C.2@2410,1005 2410,1009.26 2442.5,1041.76 2442.5,1087.35 2411.18,1118.67 AmpC.4 ; AmpC.4@2410,1140 2412.19,1137.81 2487.82,1137.81 RoC-.1
NetAmpC_5: AmpC.5 RfC.2 RoC+.1 | length 227
  Top Layer w15: AmpC.5@2410,1300 2410.38,1300.38 2490.39,1300.38 RoC+.1 ; AmpC.5@2410,1316.31 2445,1351.31 2445,1399.45 2414.37,1430.08 RfC.2
NetAmpC_8: AmpC.8 RfC.1 RgC.2 | length 251.5
  Top Layer w15: RgC.2@2255,1275 RgC.2 2290,1275 2315,1300 2333.65,1300 AmpC.8 ; AmpC.8@2335,1300.76 2335,1316.9 2302.5,1349.4 2302.5,1396.95 2335.63,1430.08 RfC.1
NetAmpD_1: AmpD.1 R1D.2 R2D.1 | length 238.7
  Top Layer w15: R1D.2@2245.51,595 2290,595 2310,575 2329.01,575 AmpD.1 2329.41,558.67 2302.5,531.76 2302.5,479.34 2325,456.84 R2D.1@2325,450 ; R1D.2@2250,595 R1D.2
NetAmpD_2: AmpD.2 C1D.1 | length 248.5
  Top Layer w15: v1(2250,450) C1D.1 ; v1(2340,515) 2340,524.47 2353.64,538.11 2353.64,574.05 AmpD.2
  Bottom Layer w15: v1(2250,450) 2256.7,456.7 2281.7,456.7 v1(2340,515)
NetAmpD_4: AmpD.4 R2D.2 RoD-.1 | length 237.4
  Top Layer w15: R2D.2@2405,450 2405,454.26 2437.5,486.76 2437.5,530.53 2415.53,552.5 2412.35,552.5 2406.18,558.67 AmpD.4 ; AmpD.4@2405,590 2405,587.54 2407.54,585 RoD-.1
NetAmpD_5: AmpD.5 RfD.2 RoD+.1 | length 230.4
  Top Layer w15: AmpD.5@2405,740 2405.58,740.58 2480.59,740.58 RoD+.1 ; AmpD.5@2405,740.76 2405,756.31 2437.5,788.81 2437.5,836.95 2409.37,865.08 RfD.2
NetAmpD_8: AmpD.8 RfD.1 RgD.2 | length 240.7
  Top Layer w15: RgD.2@2250,715 RgD.2 2290,715 2310,735 2328.05,735 2329.41,736.36 AmpD.8 ; AmpD.8@2330,745 2330,756.9 2302.5,784.4 2302.5,836.95 2330.63,865.08 RfD.1
NetC1_PGA1_1: C1_PGA1.1 PGA1.3 R1.1 | length 340
  Top Layer w15: PGA1.3 1568.48,2185.18 1537.18,2185.18 1491.71,2230.65 1491.71,2248.29 1485,2255 1486.04,2256.04 1486.04,2304.07 1534.42,2352.46 C1_PGA1.1
NetC2_1: C2.1 PGA1.12 R2.1 | length 323.5
  Top Layer w15: R2.1@1485,1890 1485,1886.17 1495.25,1875.93 1528.94,1875.93 1613.06,1791.81 C2.1 C2.1@1597.86,1813.95 ; R2.1@1485,1895 1485,1903.83 1533.32,1952.15 1568.48,1952.15 PGA1.12
NetC3_1: C3.1 PGA2.3 R3.1 | length 363.7
  Top Layer w15: R3.1@1462.48,1142.48 1462.48,1212.76 1471.27,1221.55 1594.74,1221.55 1616.88,1243.69 C3.1 ; R3.1@1465,1140 1465,1127.64 1512.46,1080.18 1553.48,1080.18 PGA2.3
NetC4_1: C4.1 PGA2.12 R4.1 | length 311.8
  Top Layer w15: PGA2.12 1553.48,847.15 1504.78,847.15 1455,797.36 1459.35,797.36 1466.71,790 1489.87,790 1593.06,686.81 C4.1
NetPGA1_4: PGA1.4 R1.2 | length 191.9
  Top Layer w15: R1.2@1415,2247.68 1452.68,2210 1478.28,2210 1528.7,2159.59 1568.48,2159.59 PGA1.4
NetPGA1_11: PGA1.11 R2.2 | length 193.6
  Top Layer w15: R2.2 1430.29,1904.23 1430.29,1921.21 1443.15,1934.07 1481.31,1934.07 1524.97,1977.74 1568.48,1977.74 PGA1.11
NetPGA2_4: PGA2.4 R3.2 | length 200.6
  Top Layer w15: R3.2 1406.75,1130.77 1406.75,1118.25 1430,1095 1457.86,1095 1499.63,1053.23 PGA2.4
NetPGA2_11: PGA2.11 R4.2 | length 202.9
  Top Layer w15: R4.2 1392.52,799.84 1422.68,830 1452.24,830 1496.33,874.09 PGA2.11
PGA_A_Out: PGA1.24 R1A.1 | length 447.8
  Top Layer w15: PGA1.24 1811.36,2134 1850.74,2134 1921.74,2205 2015,2205 2095.4,2285.4 R1A.1
PGA_B_Out: PGA1.19 R1B.1 | length 521.4
  Top Layer w10: PGA1.19@1808.03,2006.02 PGA1.19@1809.06,2005
  Top Layer w15: PGA1.19 1810.84,2005.52 1855.52,2005.52 1921.05,1940 2020,1940 2121.91,1838.09 2121.91,1810.45 2195,1737.36 R1B.1@2195,1730
PGA_C_Out: PGA2.24 R1C.1 | length 456.9
  Top Layer w15: PGA2.24 1838.68,1027.64 1911.05,1100 2014.67,1100 2079.67,1165 R1C.1 R1C.1@2195,1165
PGA_D_Out: PGA2.19 R1D.1 | length 541.4
  Top Layer w15: PGA2.19 1796.36,898.33 1837.72,898.33 1876.38,859.66 1876.9,859.66 1896.57,840 1988.03,840 2190,638.03 R1D.1@2190,600
"Sensor A (+)": B1.2 PGA1.6 | length 859
  Top Layer w15: B1.2@826.61,1953.39 836.14,1953.39 1052.76,2170 1461.72,2170 1523.31,2108.41 1568.48,2108.41 PGA1.6
"Sensor A (-)": B1.1 PGA1.5 | length 809.5
  Top Layer w15: B1.1 923.82,2190 1470,2190 1527.36,2132.64 PGA1.5
"Sensor B (+)": B1.3 PGA1.9 | length 833.8
  Top Layer w15: B1.3 984.19,1974.78 1460.35,1974.78 1515.85,2030.28 PGA1.9
"Sensor B (-)": B1.4 PGA1.10 | length 877.4
  Top Layer w15: B1.4@827.8,1677.8 1104.07,1954.07 1473.03,1954.07 1522.28,2003.33 1568.48,2003.33 PGA1.10
"Sensor C (+)": B1.7 PGA2.6 | length 836.7
  Top Layer w15: B1.7@825,1260 829.41,1260 1034.19,1055.22 1404.68,1055.22 1404.9,1055 1435.67,1055 1488.62,1002.05 PGA2.6
"Sensor C (-)": B1.6 PGA2.5 | length 884.1
  Top Layer w15: B1.6@825,1400 827.2,1400 1151.99,1075.22 1412.97,1075.22 1413.18,1075 1449.58,1075 1496.94,1027.64 PGA2.5
"Sensor D (+)": B1.8 PGA2.9 | length 858.5
  Top Layer w15: B1.8@825,1125 826.61,1125 1081.83,869.78 1404.68,869.78 1404.9,870 1435.67,870 1490.95,925.28 PGA2.9
"Sensor D (-)": B1.9 PGA2.10 | length 806.5
  Top Layer w15: B1.9@825,985 828.82,985 964.04,849.78 1412.97,849.78 1413.18,850 1443.95,850 1493.64,899.68 PGA2.10
SHDN-A: AmpA.7 PGA1.25 | length 750.4
  Top Layer w15: PGA1.25 1811.36,2159.59 1848.05,2159.59 1913.46,2225 1980.48,2225 2040,2284.52 v1(2040,2285) ; v1@2350,2495 2356.7,2488.3 2356.7,2463 2363.64,2456.06 2363.64,2432.12 AmpA.7
  Bottom Layer w15: v1(2040,2285) 2135,2380 2170,2380 v1(2265,2475) 2320.13,2475 2340.53,2495.4 v1(2350,2495.4)
SHDN-B: AmpB.7 PGA1.18 | length 455
  Top Layer w15: PGA1.18 1811.36,1977.74 1855.03,1977.74 1914.92,1917.84 1977.16,1917.84 v1(2045,1850) ; v1(2345,1940) 2345,1930.53 2363.64,1911.89 2363.64,1876.36 AmpB.7@2365,1875
  Bottom Layer w15: v1(2260,1920) 2269.47,1920 2289.47,1940 v1(2345,1940)
SHDN-C: AmpC.7 PGA2.25 | length 442
  Top Layer w15: PGA2.25 1796.36,1054.59 1836.15,1054.59 1901.57,1120 1965,1120 v1(2025,1180) ; v1(2340,1365) 2340,1355.53 2358.64,1336.89 2358.64,1301.36 AmpC.7@2360,1300
  Bottom Layer w15: v1(2260,1350) 2269.47,1350 2284.47,1365 v1(2340,1365)
SHDN-D: AmpD.7 PGA2.18 | length 453.5
  Top Layer w15: PGA2.18 1796.36,872.74 1835.03,872.74 1868.1,839.66 1868.62,839.66 1888.28,820 1955,820 v1(2030,745) ; v1(2340,805.4) 2340,795.93 2355,780.93 AmpD.7 AmpD.7@2355,740
  Bottom Layer w15: v1(2255,785) 2264.47,785 2284.87,805.4 v1(2340,805.4)
VCC+: Cp1+.1 Cp2+.1 Cp3+.1 Cp4+.1 Cpga1+.1 Cpga2+.1 PGA1.8 PGA1.21 PGA2.8 PGA2.21 | length 1355.8
  Top Layer w12: Cp2+.1@1375,1779.02 Cp2+.1 ; PGA1.8@1566.98,2053.01 PGA1.8
  Top Layer w15: v1(1255,915) 1264.47,915 1289.69,889.78 1396.4,889.78 1396.61,890 1406.5,890 1435,918.5 Cp3+.1@1435,921.5 ; v1(1270,2015) 1279.47,2015 1299.69,1994.78 1411.28,1994.78 1440,2023.5 Cp1+.1@1440,2025 ; v1(1280,1830) 1330,1780 Cp2+.1 ; v1(1295,735) 1301.7,728.3 1337.25,728.3 1385.55,680 Cp4+.1 ; Cp3+.1@1437.56,925 1463.43,950.87 PGA2.8 ; PGA2.21@1795.87,950.87 1905.47,950.87 ; PGA1.21@1805,2055 1930,2055 ; Cpga2+.1 1905.47,950.87 ; Cpga1+.1@1930,2010 1930,2055 ; v1(2040,930) 2033.3,936.7 1999.17,936.7 1985,950.87 1905.47,950.87 ; v1(2055,2040) 2045.53,2040 2030.53,2055 1930,2055
VCC-: Cp1-.1 Cp2-.1 Cp3-.1 Cp4-.1 Cpga1-.1 Cpga2-.1 PGA1.7 PGA1.22 PGA2.7 PGA2.22 | length 1350.2
  Top Layer w12: PGA1.7@1566.98,2084.32 PGA1.7
  Top Layer w15: v1(1255,1010) 1264.47,1010 1289.69,1035.22 1396.4,1035.22 1396.61,1035 1406.5,1035 1435,1006.5 1435,1003.5 1434.53,1003.03 1461.1,976.46 PGA2.7 ; v1(1270,2125) 1279.47,2125 1299.69,2145.22 1411.28,2145.22 1440,2116.5 Cp1-.1@1440,2115 ; v1(1285,2330) 1335,2380 Cp2-.1 ; v1(1300,1245) 1306.7,1251.7 1342.25,1251.7 1390.55,1300 Cp4-.1 ; PGA2.22@1795,975 1905.47,975 ; PGA1.22@1810,2080 1811.46,2081.46 1930,2081.46 ; Cpga2-.1 1905.47,975 ; Cpga1-.1@1930,2120 1930,2081.46 ; Cpga1-.1@1930,2122.56 Cpga1-.1@1930,2125 ; v1(2040,990) 2038.59,991.41 2001.41,991.41 1985,975 1905.47,975 ; v1(2055,2100) 2047.26,2100 2028.71,2081.46 1930,2081.46
pads on no net: B1.5 PGA1.29 PGA2.29

## Silkscreen, mask and mechanical layers (free items; w line width, h text height)
Top Overlay:
  circle w7.87: c1330,1720 r1.97
  circle w7.87: c1695,1825 r1.97
  circle w7.87: c2585,2560 r1.97
  circle w7.87: c2300,1965 r1.97
  circle w7.87: c2185,1810 r1.97
  circle w7.87: c2495,1855 r1.97
  circle w7.87: c2500,1690 r1.97
  circle w7.87: c2275,1680 r1.97
  circle w7.87: c2180,1690 r1.97
  circle w7.87: c2605,1655 r1.97
  circle w7.87: c2590,2005 r1.97
  circle w7.87: c2605,1830 r1.97
  circle w7.87: c1460,2145 r1.97
  circle w7.87: c1550,1825 r1.97
  circle w7.87: c2465,550 r1.97
  circle w7.87: c2585,1435 r1.97
  circle w7.87: c2575,870 r1.97
  circle w7.87: c2460,710 r1.97
  circle w7.87: c2570,545 r1.97
  circle w7.87: c2265,550 r1.97
  circle w7.87: c2650,610 r1.97
  circle w7.87: c2170,680.4 r1.97
  circle w7.87: c2295,830 r1.97
  circle w7.87: c2280,1390 r1.97
  circle w7.87: c2175,1240.4 r1.97
  circle w7.87: c2665,1165 r1.97
  circle w7.87: c2175,1125 r1.97
  circle w7.87: c2580,1090 r1.97
  circle w7.87: c2480,1275.4 r1.97
  circle w7.87: c1460,2060 r1.97
  circle w7.87: c1410,1850 r1.97
  circle w7.87: c2485,2405.4 r1.97
  circle w7.87: c2490,2245.4 r1.97
  circle w7.87: c2600,2200.4 r1.97
  circle w7.87: c2300,1535 r1.97
  circle w7.87: c2305,2085 r1.97
  circle w7.87: c2175,2230.4 r1.97
  circle w7.87: c2670,2300.4 r1.97
  circle w7.87: c2180,2370.4 r1.97
  circle w7.87: c2320,2540.4 r1.97
  circle w7.87: c1335,2315 r1.97
  circle w7.87: c1490,2295 r1.97
  circle w7.87: c1595,2285 r1.97
  lines w10: 2190,560 2250,560 ; 2190,630.4 2250,630.4 ; 2190,680 2250,680 ; 2190,750 2250,750 ; 2192.91,1235.4 2252.91,1235.4 ; 2192.91,1315.4 2252.91,1315.4 ; 2195,1125.4 2255,1125.4 ; 2195,1205.4 2255,1205.4 ; 2195,2255.4 2255,2255.4 ; 2195,2315.4 2255,2315.4 ; 2197.91,2375.4 2257.91,2375.4 ; 2197.91,2435.4 2257.91,2435.4 ; 2200,1700 2250,1700 ; 2200,1760 2250,1760 ; 2200,1820 2250,1820 ; 2200,1880 2250,1880